# EAGLE board driver_piezo2 (EAGLE 7.0.0)
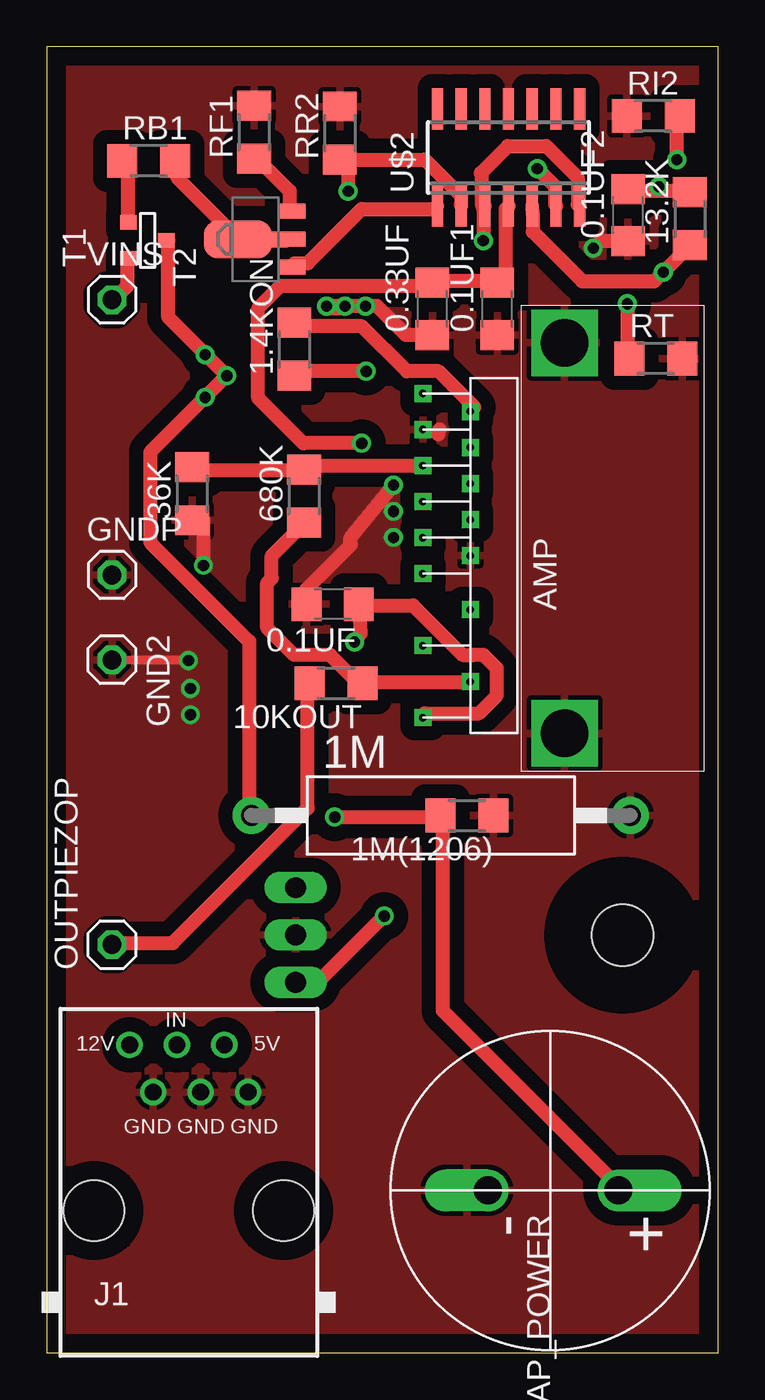
[diagram p0: board, top side]
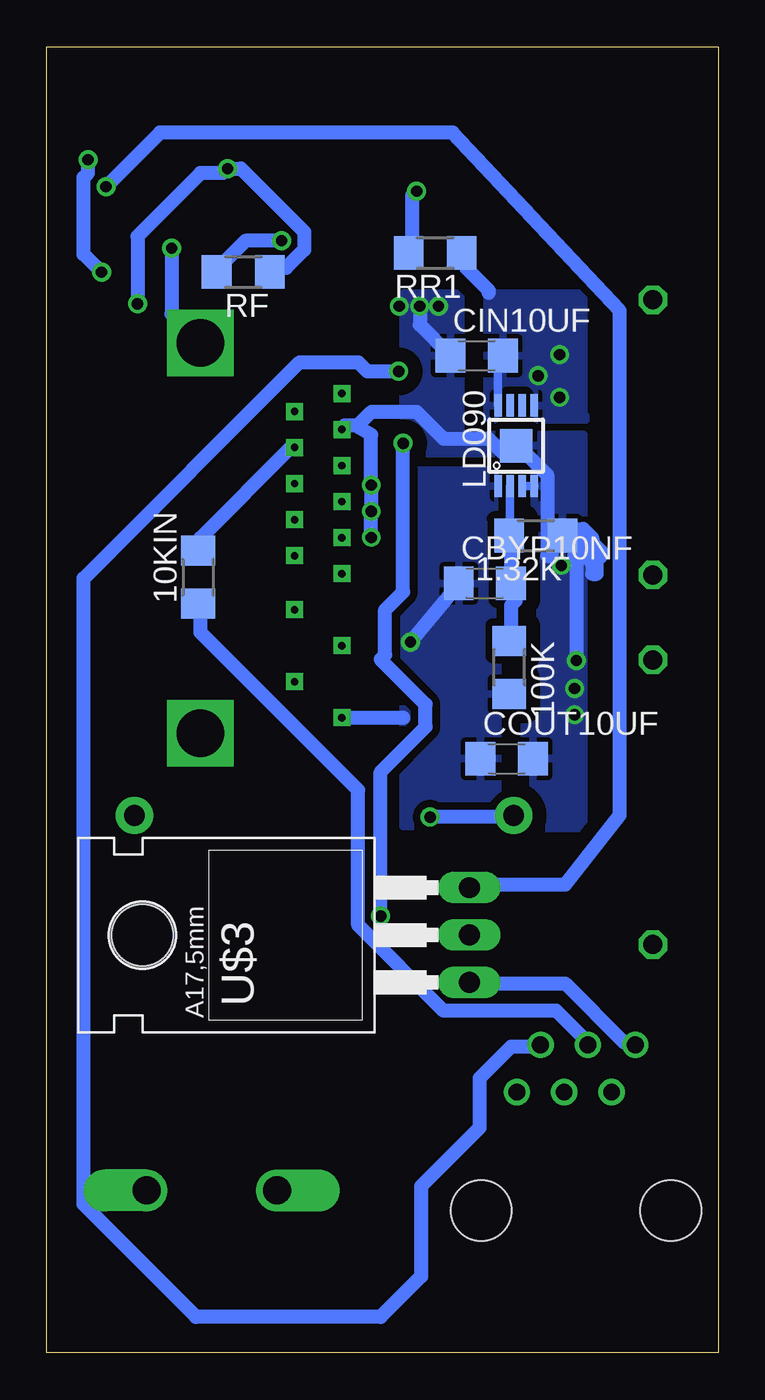
[diagram p1: board, bottom side, seen from below]

Size 36 x 70 mm. Coordinates in mm from the lower left corner, seen from the top.
Outline: 0,0 36,0 36,70 0,70 0,0
Copper layers (1*16): Top 0.035mm / dielectric 1.5mm / Bottom 0.035mm
Design rules "default *": minimum track width 30mil, minimum drill 24mil, track to track 8mil, track to pad 8mil, pad to pad 8mil, via to via 8mil, smd to smd 8mil, copper to edge 40mil, drill to drill 8mil, minimum pad ring 10mil, minimum via ring 8mil, stop-mask expansion 4mil, vias tented up to drill 0mil, thermal gap 10mil
Net classes: 1 PWR: width 0.127 mm, clearance 0.406 mm; 2 GND: width 0.127 mm, clearance 0.762 mm; 3 VIN: width 0.127 mm, clearance 0.406 mm; 4 5V: width 0.406 mm, clearance 0.61 mm

## Footprints (pad centres in the part's own frame; a part is rotated, then mirrored left to right if it is on the bottom)
C1206 = smd 1.6 x 1.8: 1 -1.4,0; 2 1.4,0
R1206 = smd 1.6 x 1.803: 1 -1.422,0; 2 1.422,0
CA0002 = drill 1.1 pad 2: 1 -10.16,0; 2 10.16,0
POWER_AMP_LME49811TB = drill 0.4 square: -VEE -1.351,-0.455; COMP -1.351,3.405; GND -3.891,6.3; IN+ -1.351,5.335; IN- -3.891,4.37; NC -1.351,-3.35; NC1 -3.891,-1.42; NC2 -3.891,0.51; NC3 -1.351,1.475; NC4 -3.891,2.44; NC5 -3.891,8.23; SD -1.351,7.265; SINK -3.891,-5.28; SOURCE -1.351,-7.21; VCC -3.891,-9.14
CAP200V = drill 1.5 offset: + 0,3.65; - 0,-3.35
1X01 = drill 1.016 octagon: 1 0,0
RJ12-STRAIGHT-ANALOG = drill 0.9 pad 1.4: +5V 1.905,8.89; +12V -3.175,8.89; GND1 3.175,6.35; GND2 0.635,6.35; GND3 -1.905,6.35; IN -0.635,8.89 | hole 3.251: -5.08,0; 5.08,0
S-PDSO-G08 = smd 0.4 x 1.2: 1 -0.975,-2.157; 2 -0.325,-2.157; 3 0.325,-2.157; 4 0.975,-2.157; 5 0.975,2.157; 6 0.325,2.157; 7 -0.325,2.157; 8 -0.975,2.157 | smd 1.73 x 1.78: TH 0,0
SOT-23 = smd 0.787 x 0.889: 1 0.025,-1.016; 2 -0.94,1.016; 3 0.991,1.016
SOT89 = smd 0.8 x 1.4: 1 -1.499,-1.981; 3 1.499,-1.981 | smd 0.8 x 1.9: 2 0,-1.727 | smd 2.032 x 3.65: 2@1 0,0.94
DISIPADOR = drill 2.55 square: P$1 -2.72,-9.98; P$2 -2.72,10.95
SO14 = smd 0.6 x 2.2: 1 -3.81,-2.6; 2 -2.54,-2.6; 3 -1.27,-2.6; 4 0,-2.6; 5 1.27,-2.6; 6 2.54,-2.6; 7 3.81,-2.6; 8 3.81,2.6; 9 2.54,2.6; 10 1.27,2.6; 11 0,2.6; 12 -1.27,2.6; 13 -2.54,2.6; 14 -3.81,2.6
TO220 = drill 1.118 long: 1 -2.54,-10.16; 2 0,-10.16; 3 2.54,-10.16 | hole 3.302: 0,7.366

## Placement (x,y rotation side)
0.1UF  [C1206]  15.33,40.12 180 top
0.1UF1  [C1206]  24.16,55.95 90 top
0.1UF2  [C1206]  31.16,60.97 90 top
0.33UF  [C1206]  20.68,55.95 90 top
1.4KON  [R1206]  13.28,53.79 90 top
1.32K  [R1206]  9.78,43.8 180 bottom
1M  [CA0002]  21.13,28.8 0 top
1M(1206)  [R1206]  22.53,28.8 180 top
10KIN  [R1206]  27.88,41.57 90 bottom
10KOUT  [R1206]  15.52,35.88 180 top
13.2K  13.2K  [R1206]  34.48,60.78 90 top
36K  [R1206]  7.8,46.04 90 top
100K  [R1206]  11.2,36.73 270 bottom
680K  [R1206]  13.8,45.92 90 top
AMP  POWER_AMP_LME49811TB  [POWER_AMP_LME49811TB]  24.06,43.18 0 top
CAP_POWER  CAP200VCAP200V  [CAP200V]  27,8.7 270 top
CBYP10NF  [C1206]  12.51,41.24 0 bottom
CIN10UF  [C1206]  12.95,53.44 0 bottom
COUT10UF  [C1206]  11.34,31.84 0 bottom
GND2  [1X01]  3.5,37.14 270 top
GNDP  [1X01]  3.5,41.69 0 top
J1  RJ12STRAIGHT-ANALOG  [RJ12-STRAIGHT-ANALOG]  7.62,7.62 0 top
LD090  TPS7A4001  [S-PDSO-G08]  10.83,48.61 0 bottom
OUTPIEZOP  [1X01]  3.5,21.88 90 top
RB1  100k  [R1206]  5.47,63.88 0 top
RF  10k  [R1206]  25.46,57.92 180 bottom
RF1  10k  [R1206]  11.12,65.42 90 top
RI2  280k  [R1206]  32.52,66.28 0 top
RR1  810k-806k  [R1206]  15.17,58.94 180 bottom
RR2  90k  [R1206]  15.72,65.37 90 top
RT  10k  [R1206]  32.66,53.28 0 top
T1  FMMT718  [SOT-23]  5.41,59.59 90 top
T2  [SOT89]  11.19,59.68 90 top
U$1  DISIPADOR  [DISIPADOR]  30.48,43.18 0 top
U$2  LM324  [SO14]  24.76,64.06 0 top
U$3  7805  [TO220]  23.5,22.39 90 bottom
VINS  [1X01]  3.5,56.44 0 top

## Library data of the parts
0.1UF 0.1UF1 0.1UF2 0.33UF CBYP10NF CIN10UF COUT10UF = rcl
1.4KON 1.32K 1M(1206) 10KIN 10KOUT 13.2K 36K 100K 680K RB1 RF RF1 RI2 RR1 RR2 RT = resistor
1M = resistor-power; OC_FARNELL: unknown; OC_NEWARK: unknown
AMP CAP_POWER LD090 U$1-U$3 = PIEZO_LBR
GND2 GNDP OUTPIEZOP VINS = pinhead
J1 = lpatiny
T1 = zetex; MPN: FMMT718; OC_FARNELL: 9526463RL; OC_NEWARK: 96K9968
T2 = zetex; MPN: DSS4540X-13; OC_FARNELL: 1710677; OC_NEWARK: 25R4564

## Nets
1OUT: T2.1 U$2.1
2IN+: 13.2K.1 RI2.2 U$2.5
2IN-: RF.1 RT.1 U$2.6
2OUT: RF.2 U$2.3 U$2.7
5V [5V]: 1.4KON.1 J1.+5V
5VOP: 0.1UF2.2 13.2K.2 U$3.3
12V: 0.1UF1.2 0.33UF.2 J1.+12V U$2.4 U$3.1
B: 36K.2 680K.2 AMP.IN-
FB: 1.32K.2 100K.1 CBYP10NF.2 LD090.2
GND [GND]: 0.1UF1.1 0.1UF2.1 0.1UF.2 0.33UF.1 1.32K.1 1M(1206).1 1M.2 36K.1 AMP.-VEE AMP.GND CAP_POWER.- CIN10UF.1 COUT10UF.2 GND2.1 GNDP.1 J1.GND1 J1.GND2 J1.GND3 LD090.3 LD090.4 LD090.TH RF1.2 RI2.1 RR2.2 RT.2 U$1.P$1 U$1.P$2 U$2.11 U$3.2
IN_AMP: 10KIN.2 AMP.IN+
IN_VOLTAGE: 10KIN.1 J1.IN
N$3: RB1.2 T2.2 T2.2@1
N$4: RB1.1 T1.3
N$5: RF1.1 T2.3
ON: 1.4KON.2 AMP.SD
OUT_PIEZO: 10KOUT.2 OUTPIEZOP.1
SOURCE: 10KOUT.1 680K.1 AMP.SOURCE
V90 [PWR]: 0.1UF.1 100K.2 AMP.VCC CBYP10NF.1 COUT10UF.1 LD090.1
VF: RR1.2 RR2.1 U$2.2
VIN [VIN]: 1M(1206).2 1M.1 CAP_POWER.+ CIN10UF.2 LD090.5 LD090.8 RR1.1 T1.1
VINS: T1.2 VINS.1

## Tracks (layer width: path | path; a pad name or v marks a point on that pad's centre or on a via)
1OUT
  Top 0.762: U$2.1 20.75,61.29 16.89,61.29 13.99,58.4 13.27,58.4 T2.1
2IN+  (via drill 0.61)
  Top 0.762: 13.2K.1 34.27,59.12 v33.06,57.91 32.58,57.43 28.71,57.43 26.06,60.08 26.06,61.05 U$2.5 | v33.78,63.94 33.78,66.12 RI2.2
  Bottom 0.762: v33.78,63.94 33.78,63.22 34.02,62.98 34.02,58.88 v33.06,57.91
2IN-  (via drill 0.61)
  Top 0.762: v26.3,63.46 27.27,62.5 27.27,61.53 U$2.6 | v31.13,56.22 31.13,53.33 RT.1
  Bottom 0.762: RF.1 23.89,58.15 23.16,58.15 22.2,59.12 22.2,60.08 25.58,63.46 v26.3,63.46 26.54,63.22 27.75,63.22 31.13,59.84 v31.13,56.22
2OUT  (via drill 0.61)
  Top 0.762: v23.41,59.6 23.41,61.29 U$2.3 23.35,61.47 23.35,62.44 23.33,63.12 23.27,63.22 24.72,64.67 26.78,64.67 28.47,62.98 28.47,61.53 U$2.7
  Bottom 0.762: v23.41,59.6 25.34,59.6 26.78,58.15 RF.2
5V  (via drill 0.61)
  Top 0.762: v17.13,52.6 13.51,52.6 1.4KON.1
  Bottom 0.762: v17.13,52.6 18.82,52.6 19.3,53.09 22.44,53.09 34.02,41.5 34.02,7.96 27.99,1.93 18.1,1.93 15.93,4.1 15.93,8.93 12.79,12.06 12.79,14.72 11.1,16.41 9.65,16.41 J1.+5V
5VOP  (via drill 0.61)
  Top 0.762: 32.82,62.26 34.27,62.26 13.2K.2 | 32.82,62.26 31.37,62.26 0.1UF2.2 | v32.82,62.5 32.82,62.26
  Bottom 0.762: v32.82,62.5 29.92,65.39 14.24,65.39 5.29,55.84 5.29,28.82 8.2,25.09 13.03,25.09 U$3.3
12V  (via drill 0.61)
  Top 0.762: U$2.4 24.61,61.29 24.61,57.67 24.37,57.43 0.1UF1.2 23.89,57.43 20.75,57.43 0.33UF.2 20.51,57.19 12.55,57.19 11.34,55.98 11.34,51.16 13.75,48.74 v16.89,48.74 | v18.1,23.41 14.72,20.03 13.51,20.03 U$3.1
  Bottom 0.762: J1.+12V 4.58,16.65 5.07,16.65 8.2,19.79 13.03,19.79 U$3.1 | v18.1,23.41 18.1,31.13 15.68,33.54 15.68,34.75 18.1,37.16 17.86,37.4 17.86,39.81 16.89,40.78 v16.89,48.74
B
  Top 0.762: 36K.2 7.96,47.3 13.75,47.3 680K.2 13.99,47.54 20.03,47.54 AMP.IN-
FB
  Bottom 0.46: LD090.2 11.15,43.85 1.32K.2
  Bottom 0.762: 1.32K.2 11.1,43.67 11.1,41.26 CBYP10NF.2 10.86,41.02 10.86,40.3 11.1,40.06 11.1,38.37 100K.1
GND  (via drill 0.6)
  Top 0.46: GND2.1 7.6,37.14 v7.6,37.1
  Top 0.762: 36K.1 8.4,44.62 v8.4,42.2 | 0.33UF.1 19.25,54.55 17.7,56.1 v17.1,56.1 16.1,56.1 | 0.1UF2.1 29.67,59.57 v29.3,59.2 | 20.99,49.23 21.08,49.48 | 0.1UF.2 13.93,40.93 16.3,43.3 16.3,43.7 v18.6,46.5 | 16.1,56.1 v15,56.1 15,56 16.1,56 16.1,56.1
  Bottom 0.46: LD090.3 LD090.4
  Bottom 0.762: 6.27,42.71 6.76,42.23 6.76,41.74 6.51,41.74 6.51,42.23 7,42.71 7,43.19 7.24,43.19 7.24,42.95 7.48,42.95 7.48,43.19 7.24,43.43 7.24,43.67 7.72,43.67 7.72,42.71 7.24,42.71 7.2,42.61 | 6.27,42.71 6.27,42.95 6.76,43.43 6.76,43.67 7.24,44.16 8.45,44.16 8.93,43.67 8.93,42.71 9.17,42.71 9.17,47.05 10.38,48.26 11.58,48.26 12.31,48.98 14.72,48.98 16.17,50.43 18.58,50.43 19.3,49.71 19.5,49.71 | 19.5,49.71 20.03,49.71 AMP.GND | 6.27,42.71 7.6,42.71 v7.6,37.1 | v16,56.1 16,55.1 14.4,53.5 | v29.3,59.2 29.3,55.67 U$1.P$2 | 19.5,49.71 18.6,49.21 v18.6,46.5 v18.6,45.1 v18.6,43.7
  other vias: 7.7,35.6 7.7,34.2
  pour Bottom: 10.4,48.2 10.4,28.1 7.2,28.1 7.2,49.2 13.8,49.2 13.8,56.8 16.9,56.8 16.9,48.2
  pour Top: 0,70 36,70 36,0 0,0
IN_AMP
  Bottom 0.762: 10KIN.2 27.75,43.19 27.75,43.67 22.92,48.5 AMP.IN+
IN_VOLTAGE
  Bottom 0.762: 10KIN.1 27.75,40.06 27.75,38.61 19.3,30.16 19.3,22.92 14.72,18.34 8.69,18.34 7,16.65 J1.IN
N$3
  Top 0.762: RB1.2 7,63.7 7,62.98 10.13,59.84 T2.2@1 10.62,59.6 12.79,59.6 T2.2
N$4
  Top 0.762: T1.3 4.34,60.81 4.34,63.46 4.1,63.7 RB1.1
N$5
  Top 0.762: T2.3 13.03,61.29 13.03,62.26 11.34,63.94 RF1.1
ON
  Top 0.762: 1.4KON.2 13.51,55.02 16.89,55.02 19.3,52.6 20.99,52.6 22.92,50.67 AMP.SD
OUT_PIEZO
  Top 0.762: 10KOUT.2 13.99,35.71 13.99,29.2 6.76,21.96 3.62,21.96 OUTPIEZOP.1
SOURCE
  Top 0.762: 680K.1 13.75,44.4 12.06,42.71 12.06,41.5 11.82,41.26 11.82,38.85 13.27,37.4 15.2,37.4 16.72,35.88 10KOUT.1 17.13,35.95 22.68,35.95 AMP.SOURCE
V90  (via drill 0.6)
  Top 0.762: AMP.VCC 20.27,34.27 23.16,34.27 24.13,35.23 24.13,36.68 23.41,37.4 22.92,37.4 22.3,37.4 19.64,40.06 16.89,40.06 0.1UF.1 16.83,38.57 v16.5,38.1
  Bottom 0.762: 16.89,34.02 20.03,34.02 AMP.VCC | CBYP10NF.1 13.94,41.14 v16.5,38.1
  pour Bottom: 11.8,47.3 11.8,28.2 16.9,28.2 16.9,47.3
VF  (via drill 0.61)
  Top 0.762: U$2.2 22.2,61.53 22.2,62.01 20.27,63.94 15.93,63.94 RR2.1 16.17,63.7 v16.17,62.26
  Bottom 0.762: v16.17,62.26 16.41,62.01 16.41,59.12 RR1.2
VIN  (via drill 0.6, 0.61)
  Top 0.762: T1.1 6.51,59.6 6.51,55.5 v9.65,52.36 5.55,48.26 5.55,43.43 10.86,38.12 10.86,28.96 1M.1 | CAP_POWER.+ 30.64,8.93 21.23,18.34 21.23,28.71 1M(1206).2 20.75,28.71 v15.44,28.71
  Bottom 0.46: LD090.8 11.8,53.19 CIN10UF.2
  Bottom 0.762: RR1.1 13.51,58.88 13.51,58.15 12.31,56.95 12.31,56.8 | v15.44,28.71 11.1,28.71 1M.1
  other vias: 8.5,53.5 8.5,51.2
  pour Bottom: 12,50 12.4,50 12.4,56.8 7.2,56.8 7.2,50.2 7.1,50.2 7.1,50
VINS
  Top 0.762: T1.2 4.34,58.64 4.34,57.19 3.62,56.46 VINS.1